# Altium PCB Sent Exp 9.PcbDoc
Units mm, origin at the board's own origin, x right, y up, seen from the top; angles counter-clockwise.
Board outline 152.4 x 136.53 mm, 2 copper layers (Top Layer, Bottom Layer); 86 components, 149 nets, 293 pads, 0 vias.
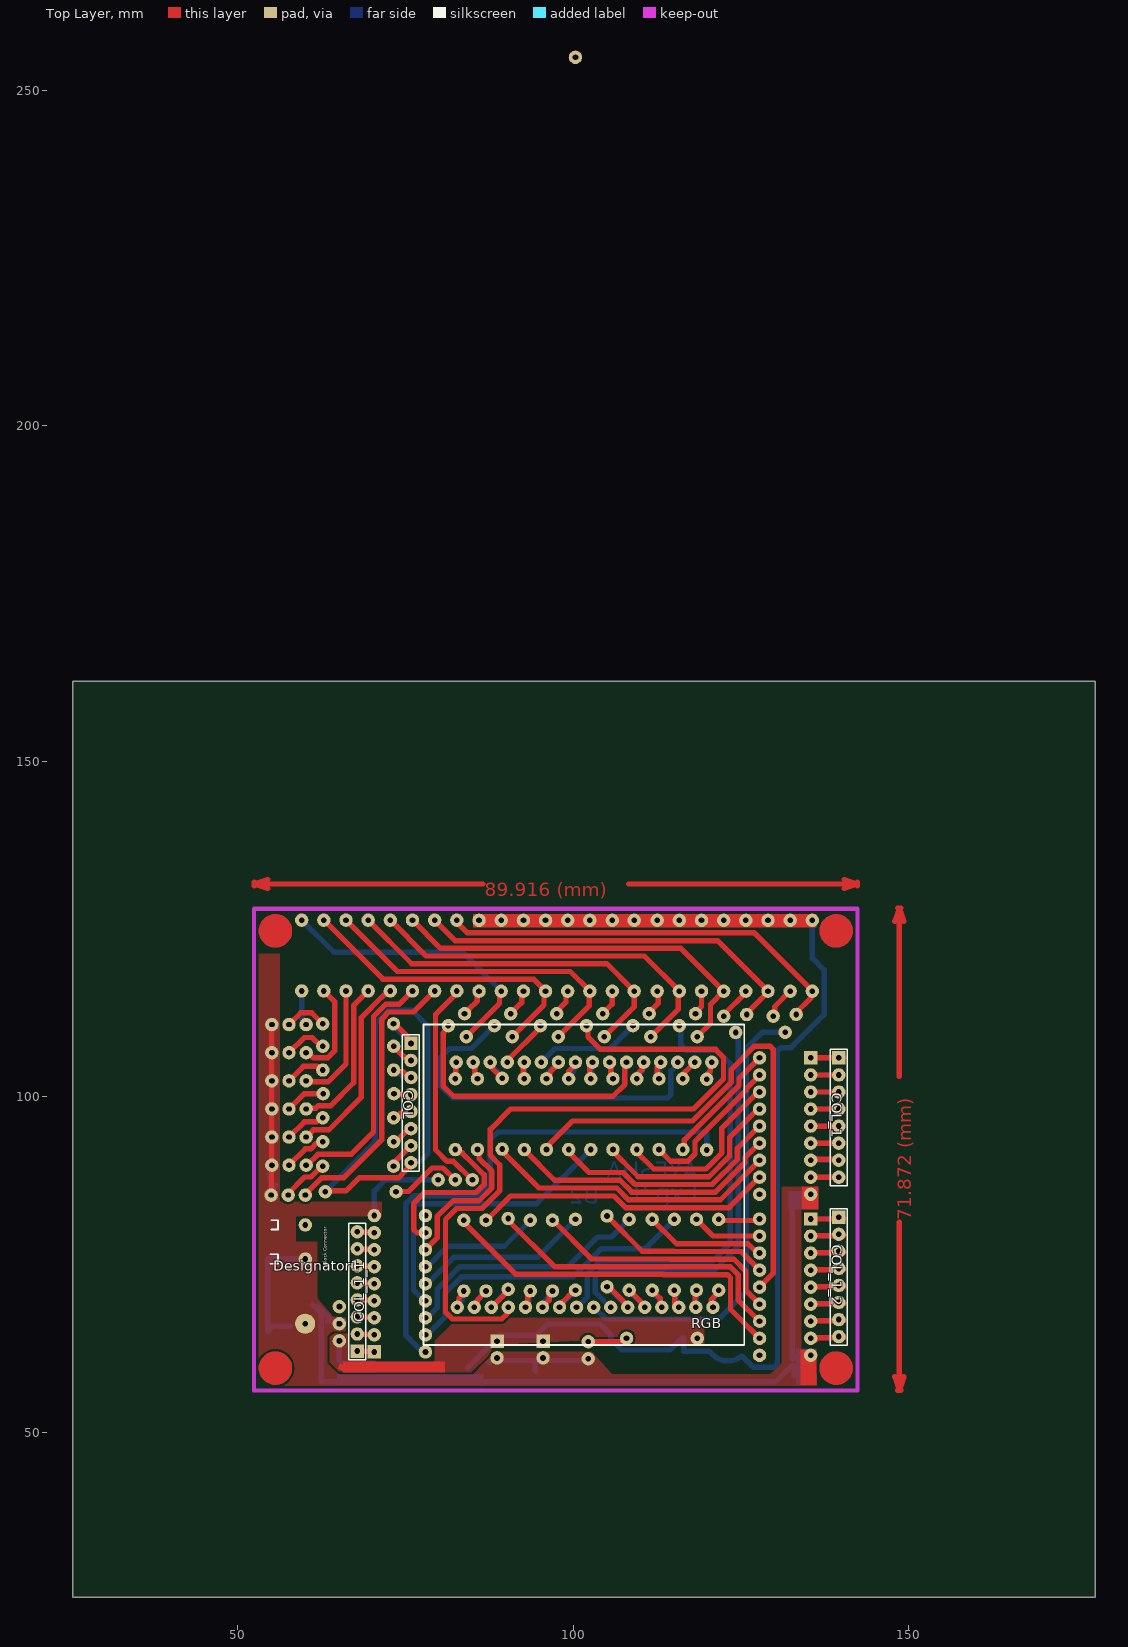
[diagram p0: Top Layer view]
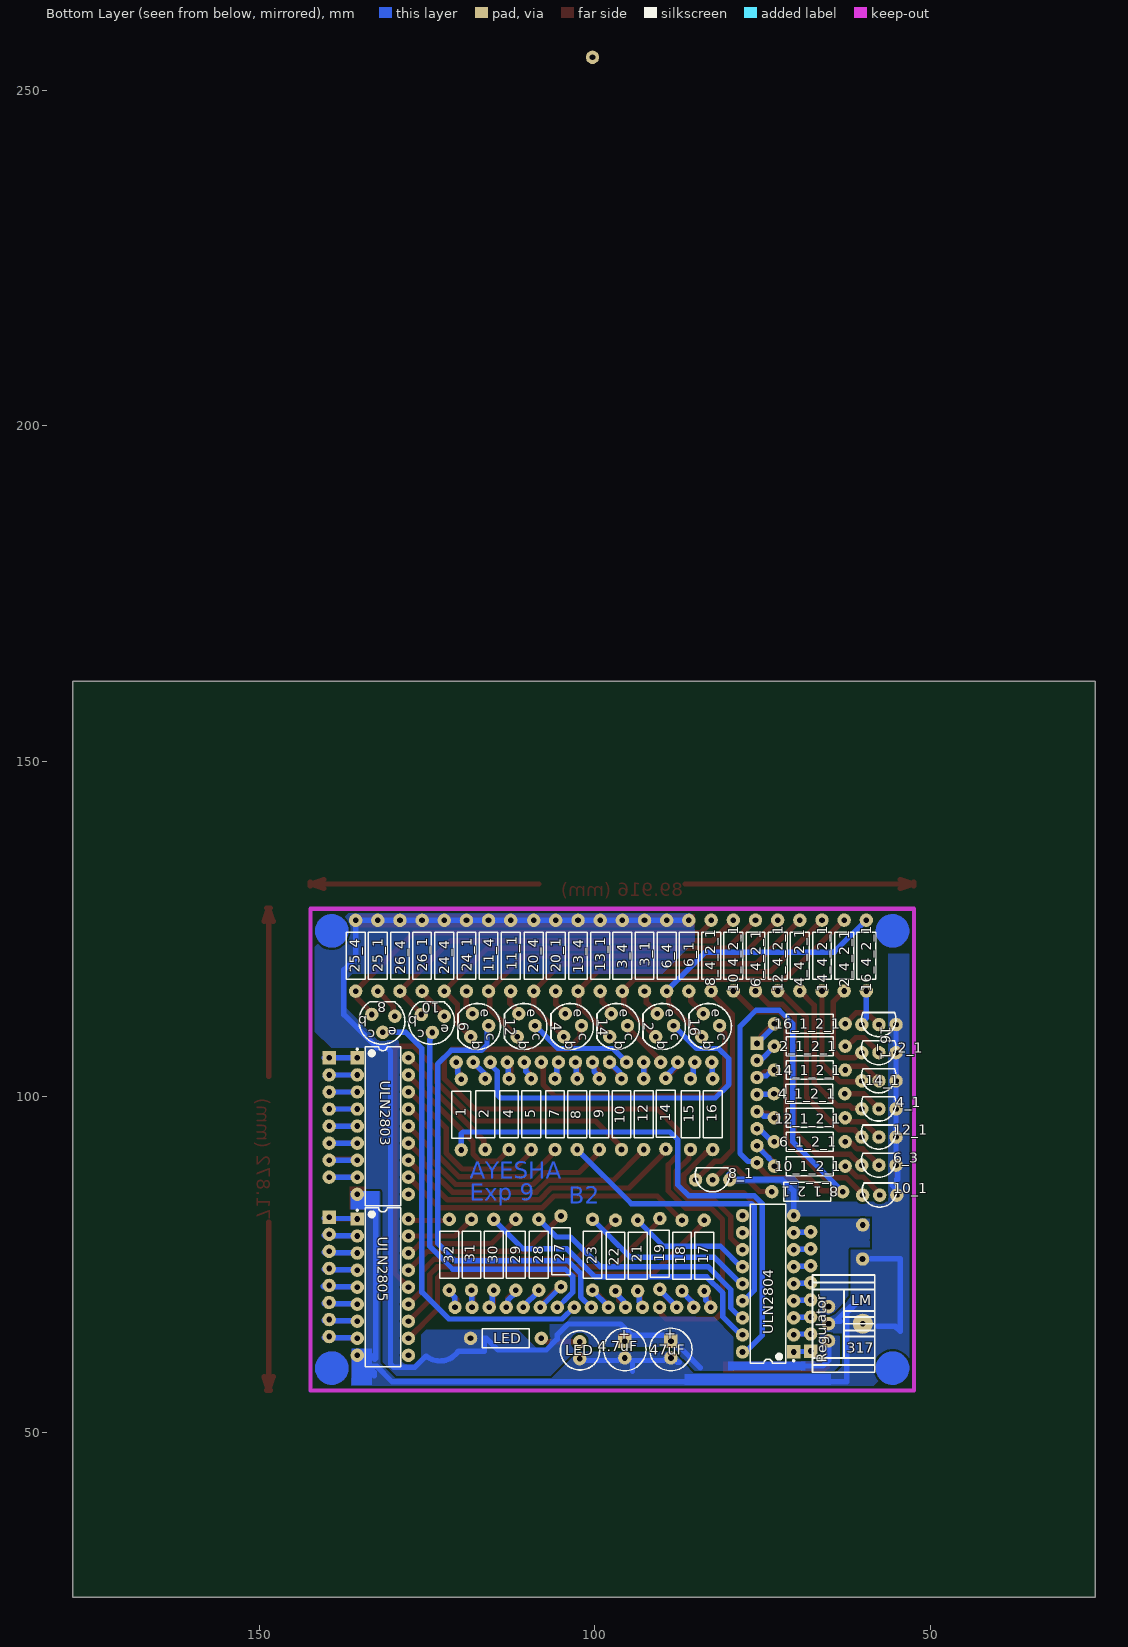
[diagram p1: Bottom Layer view, seen from below]

## Layer stack, top to bottom
Top Solder: solder mask 0.0102, Solder Resist, Dk 3.5
Top Layer: signal copper 0.0356
Dielectric 1: dielectric 0.32, FR-4, Dk 4.8
Bottom Layer: signal copper 0.0356
Bottom Solder: solder mask 0.0102, Solder Resist, Dk 3.5

## Board outline
25.4,25.4 177.8,25.4 177.8,161.925 25.4,161.925

## Design rules (kind name [scope] priority, off if disabled: settings)
Clearance [All] p1: gap=0.35 ignorepadtopadclearanceinfootprint=FALSE
PlaneClearance [All] p1: clearance=0.85
PolygonConnect [All] p1: connectstyle=Direct reliefconductorwidth=0.254 reliefentries=4 polygonreliefangle="90 Angle" airgapwidth=0.254
RoutingVias [All] p1: holewidth=0.711 width=1.27 viastyle="Through Hole" minholewidth=0.711 minwidth=1.27 maxholewidth=0.711 maxwidth=1.27
SolderMaskExpansion [All] p1: expansion=0.102 istentingtop=FALSE
Width [All] p1: maxlimit=0.8 minlimit=0.8 preferedwidth=0.8
29 further rules are at their usual default settings.

## Components (designator, comment, footprint, x,y, rotation, side; value= is the part's Value field where it differs from the comment)
1 "Comment" RES10.55-7X2.8#1 119.888,97.35 r270 bottom
2 "Comment" RES10.55-7X2.8#1 116.332,97.409 r270 bottom
2 "Comment" "TO-92 Packaging" 89.587,110.664 r0 bottom
2_1 "Comment" 2N3904 57.646,106.563 r0 bottom
2_1_2_1 "Comment" RES10.55-7X2.8#1 67.96,107.538 r180 bottom
2_4_2_1 "Comment" RES10.55-7X2.8#1 62.834,121.046 r90 bottom
3_1 "Comment" RES10.55-7X2.8#1 92.575,121.015 r90 bottom
3_4 "Comment" RES10.55-7X2.8#1 95.877,121.015 r90 bottom
4 "Comment" RES10.55-7X2.8#1 112.776,97.409 r270 bottom
4 "Comment" "TO-92 Packaging" 103.303,110.664 r0 bottom
4.7uF "Comment" CAPPR2.5-6.3x15 95.504,62.337 r270 bottom
4_1 "Comment" 2N3904 57.646,98.181 r0 bottom
4_1_2_1 "Comment" RES10.55-7X2.8#2 68.004,100.457 r180 bottom
4_4_2_1 "Comment" RES10.55-7X2.8#1 69.438,121.046 r90 bottom
5 "Comment" RES10.55-7X2.8#1 109.474,97.409 r270 bottom
6 "Comment" "TO-92 Packaging" 117.146,110.664 r0 bottom
6_1 "Comment" RES10.55-7X2.8#1 85.971,121.015 r90 bottom
6_1_2_1 "Comment" RES10.55-7X2.8#1 67.96,93.314 r180 bottom
6_3 "Comment" 2N3904 57.646,89.799 r0 bottom
6_4 "Comment" RES10.55-7X2.8#1 89.273,121.015 r90 bottom
6_4_2_1 "Comment" RES10.55-7X2.8#1 76.042,121.046 r90 bottom
7 "Comment" RES10.55-7X2.8#1 105.918,97.409 r270 bottom
8 "Comment" RES10.55-7X2.8#3 102.616,97.409 r270 bottom
8 "Comment" "TO-92 Packaging" 131.509,110.934 r90 bottom
8_1 "Comment" 2N3904 82.423,87.63 r0 bottom
8_1_2_1 "Comment" RES10.55-7X2.8#2 68.326,85.852 r0 bottom
8_4_2_1 "Comment" RES10.55-7X2.8#1 82.646,121.046 r90 bottom
9 "Comment" RES10.55-7X2.8#1 99.314,97.409 r270 bottom
10 "Comment" RES10.55-7X2.8#3 96.012,97.409 r270 bottom
10 "Comment" "TO-92 Packaging" 124.131,110.918 r90 bottom
10_1 "Comment" 2N3904 57.531,85.344 r0 bottom
10_1_2_1 "Comment" RES10.55-7X2.8#1 67.945,89.662 r180 bottom
10_4_2_1 "Comment" RES10.55-7X2.8#1 79.344,121.046 r90 bottom
11_1 "Comment" RES10.55-7X2.8#1 112.514,121.015 r90 bottom
11_4 "Comment" RES10.55-7X2.8#1 115.816,121.015 r90 bottom
12 "Comment" RES10.55-7X2.8#1 92.71,97.409 r270 bottom
12 "Comment" "TO-92 Packaging" 110.224,110.664 r0 bottom
12_1 "Comment" 2N3904 57.646,93.99 r0 bottom
12_1_2_1 "Comment" RES10.55-7X2.8#1 67.96,96.87 r180 bottom
12_4_2_1 "Comment" RES10.55-7X2.8#1 72.74,121.046 r90 bottom
13_1 "Comment" RES10.55-7X2.8#1 99.179,121.015 r90 bottom
13_4 "Comment" RES10.55-7X2.8#1 102.481,121.015 r90 bottom
14 "Comment" RES10.55-7X2.8#1 89.408,97.477 r270 bottom
14 "Comment" "TO-92 Packaging" 96.445,110.664 r0 bottom
14_1 "Comment" 2N3904 57.646,102.372 r0 bottom
14_1_2_1 "Comment" RES10.55-7X2.8#1 67.96,103.982 r180 bottom
14_4_2_1 "Comment" RES10.55-7X2.8#1 66.136,121.046 r90 bottom
15 "Comment" RES10.55-7X2.8#1 85.725,97.409 r270 bottom
16 "Comment" RES10.55-7X2.8#1 82.423,97.409 r270 bottom
16 "Comment" "TO-92 Packaging" 82.729,110.664 r0 bottom
16_1 "Comment" 2N3904 57.646,110.754 r0 bottom
16_1_2_1 "Comment" RES10.55-7X2.8#1 67.945,110.871 r180 bottom
16_4_2_1 "Comment" RES10.55-7X2.8#1 59.532,121.046 r90 bottom
17 "Comment" RES10.55-7X2.8#1 83.693,76.327 r270 bottom
18 "Comment" RES10.55-7X2.8#1 86.995,76.327 r270 bottom
19 "Comment" RES10.55-7X2.8#1 90.297,76.581 r270 bottom
20_1 "Comment" RES10.55-7X2.8#2 105.815,121.015 r90 bottom
20_4 "Comment" RES10.55-7X2.8#1 109.085,121.015 r90 bottom
21 "Comment" RES10.55-7X2.8#1 93.599,76.327 r270 bottom
22 "Comment" RES10.55-7X2.8#3 96.901,76.327 r270 bottom
23 "Comment" RES10.55-7X2.8#1 100.33,76.454 r270 bottom
24_1 "Comment" RES10.55-7X2.8#1 119.118,121.015 r90 bottom
24_4 "Comment" RES10.55-7X2.8#1 122.42,121.015 r90 bottom
25_1 "Comment" RES10.55-7X2.8#2 132.326,121.015 r90 bottom
25_4 "Comment" RES10.55-7X2.8#1 135.628,121.015 r90 bottom
26_1 "Comment" RES10.55-7X2.8#1 125.722,121.015 r90 bottom
26_4 "Comment" RES10.55-7X2.8#1 129.024,121.015 r90 bottom
27 "Comment" RES10.55-7X2.8#3 105.029,76.962 r270 bottom
28 "Comment" RES10.55-7X2.8#1 108.331,76.454 r270 bottom
29 "Comment" RES10.55-7X2.8#1 111.76,76.454 r270 bottom
30 "Comment" RES10.55-7X2.8#1 115.062,76.454 r270 bottom
31 "Comment" RES10.55-7X2.8#1 118.364,76.454 r270 bottom
32 "Comment" RES10.55-7X2.8#1 121.666,76.454 r270 bottom
47uF "Comment" CAPPR2.5-6.3x15 88.646,62.337 r270 bottom
COL "Comment" HDR1X8 75.819,107.95 r270 top
COL_1 "Comment" HDR1X8 139.573,105.791 r270 top
COL_1_1 "Comment" HDR1X8 67.818,62.103 r90 top
COL_1_2 "Comment" HDR1X8 139.573,82.042 r270 top
Designator1 "Comment" "PCB Block Connector" 59.831,78.359 r90 top
LED "Comment" RES10.55-7X2.8#1 113.225,64.008 r180 bottom
LED "Comment" LED 102.235,62.23 r180 bottom
Regulator "Comment" "LM317 with Heat Sink" 65.151,66.177 r270 bottom
RGB "Comment" "RGB 4.7X4.7" 101.684,86.894 r180 top
ULN2803 "Comment" DIP-18 131.572,95.631 r180 bottom
ULN2804 "Comment" DIP-18 74.168,72.136 r0 bottom
ULN2805 "Comment" DIP-18 131.572,71.628 r180 bottom

## Footprints (in the part's own frame and the unit in brackets; to place one, negate y for a bottom-side part, rotate by r counter-clockwise, add the part's x,y. Pads: shape width x height; smd on the part's side, far side on the other; paste and mask are expansions set on the pad)
2N3904 [mm]
  round 2 hole 0.7 slot 0.8 at 0 deg: b(0,0) c(2.55,0) e(-2.55,0)
  silkscreen extent -2.53,-1.8 2.59,1.8
CAPPR2.5-6.3x15 [mm] "Capacitor, Electrolytic, Radial; Body 6.3 x 15 mm (Dia.xH typ); Pin Spacing 2.5 mm (typ)"
  rect 2x2 hole 0.85: 1(-1.25,0)
  round 2 hole 0.85: 2(1.25,0)
  silkscreen extent -3.15,-3.15 3.15,3.15
DIP-18 [mm] "DIP; 18 Leads; Row Spacing 7.62 mm; Pitch 2.54 mm"
  rect 2x2 hole 0.85: 1(-3.81,10.16)
  round 2 hole 0.85: 2(-3.81,7.62) 3(-3.81,5.08) 4(-3.81,2.54) 5(-3.81,0) 6(-3.81,-2.54) 7(-3.81,-5.08) 8(-3.81,-7.62) 9(-3.81,-10.16) 10(3.81,-10.16) 11(3.81,-7.62) 12(3.81,-5.08) 13(3.81,-2.54) 14(3.81,0) 15(3.81,2.54) 16(3.81,5.08) 17(3.81,7.62) 18(3.81,10.16)
  silkscreen extent -3.94,-11.85 2.65,11.85, body extent -3.6,-11.8 3.6,11.8, height 5.08
HDR1X8 [mm] "Connector; Header; 8 Position"
  rect 2x2 hole 0.85: 1(0,0)
  round 2 hole 0.85: 2(2.54,0) 3(5.08,0) 4(7.62,0) 5(10.16,0) 6(12.7,0) 7(15.24,0) 8(17.78,0)
  silkscreen extent -1.27,-1.27 19.05,1.27
LED [mm]
  round 2 hole 0.85: 1(0,1.27) 2(0,-1.27)
  silkscreen extent -2.87,-2.95 2.98,2.89
"LM317 with Heat Sink" [mm]
  round 2 hole 0.85 slot 0.8 at 0 deg: adj(-2.55,0) in(2.55,0) out(0,0)
  round 3 hole 0.85: out(0,5.1)
  silkscreen extent -7.25,-2.4 7.25,6.9
"PCB Block Connector" [mm]
  round 2 hole 0.85: 1(-2.54,-0.254) 2(2.54,-0.24)
  silkscreen extent -3.22,3.82 3.26,4.96, body extent -5,-5.45 5.03,4.96, height 5.08
RES10.55-7X2.8#1 [mm] "Resistor, Axial; Body 7 x 2.8 mm (LxDia. max), Lead Dia. 0.65 mm (max)"
  round 2 hole 0.85: 1(-5.275,0) 2(5.275,0)
  silkscreen extent -3.5,-1.4 3.5,1.4
RES10.55-7X2.8#2 [mm] "Resistor, Axial; Body 7 x 2.8 mm (LxDia. max), Lead Dia. 0.65 mm (max)"
  round 2 hole 0.85: ""(-5.275,0) ""(5.275,0)
  silkscreen extent -3.5,-1.4 3.5,1.4
RES10.55-7X2.8#3 [mm] "Resistor, Axial; Body 7 x 2.8 mm (LxDia. max), Lead Dia. 0.65 mm (max)"
  round 2 hole 0.85: 1(-5.275,0) ""(5.275,0)
  silkscreen extent -3.5,-1.4 3.5,1.4
"RGB 4.7X4.7" [mm]
  round 2 hole 0.85: 1(-18.966,-18.262) 2(-16.426,-18.262) 3(-13.886,-18.262) 4(-11.346,-18.262) 5(-8.806,-18.262) 6(-6.266,-18.262) 7(-3.726,-18.262) 8(-1.186,-18.262) 9(1.354,-18.262) 10(3.894,-18.262) 11(6.434,-18.262) 12(8.974,-18.262) 13(11.514,-18.262) 14(14.054,-18.262) 15(16.594,-18.262) 16(19.134,-18.262) 17(18.966,18.262) 18(16.426,18.262) 19(13.886,18.262) 20(11.346,18.262) 21(8.806,18.262) 22(6.266,18.262) 23(3.726,18.262) 24(1.186,18.262) 25(-1.354,18.262) 26(-3.894,18.262) 27(-6.434,18.262) 28(-8.974,18.262) 29(-11.514,18.262) 30(-14.054,18.262) 31(-16.594,18.262) 32(-19.134,18.262)
  silkscreen extent -23.78,-23.9 23.99,23.89
"TO-92 Packaging" [mm] "for 2N3904"
  round 2 hole 0.85: P_b(1.334,1.714) P_c(-1.333,0.063) P_e(1.08,-1.715)
  silkscreen extent -3.1,-3.23 3.22,3.61

## Free pads (board coordinates)
  round 2 hole 0.85: 2(100.33,254.889)

## Nets (pads, with @x,y where several pads share a name; then routed paths per layer and width w, separated by ;. In a path a pad name is that pad's centre, name@x,y a point inside that pad or via, vN(x,y) a via of type N, cw(c..) or ccw(c..) an arc to the next point about the centre after c; other vN are vias at no path point)
1: 1.1 RGB.1 | length 6.1
  Top Layer w0.8: 1.1@119.253,102.625 119.483,102.855 119.793,102.855 120.118,103.179 120.118,103.49 120.461,103.833 120.461,104.967 RGB.1
  Bottom Layer w0.8: 1.1 119.888,102.95 120.42,103.482 120.42,104.926 RGB.1
2: 2.1 RGB.2 | length 6.7
  Top Layer w0.8: 2.1@115.697,102.684 115.697,102.714 118.11,105.127 RGB.2
  Bottom Layer w0.8: 2.1 116.562,102.914 116.562,103.593 118.11,105.142 RGB.2
3: 2.P_c RGB.3 | length 54.9
  Bottom Layer w0.8: 2.P_c 84.84,107.188 81.534,107.188 80.01,105.664 80.01,101.854 82.042,99.822 114.057,99.822 114.526,100.291 114.526,103.787 115.57,104.831 RGB.3
4: 4.1 RGB.4 | length 5.3
  Top Layer w0.8: 4.1@112.395,102.684 112.503,102.792 112.503,104.304 113.03,104.831 RGB.4
  Bottom Layer w0.8: 4.1 112.903,102.811 112.903,105.029 RGB.4
5: 5.1 RGB.5 | length 5.6
  Top Layer w0.8: 5.1@109.093,102.684 109.093,102.871 110.26,104.038 RGB.5@110.26,104.878
  Bottom Layer w0.8: 5.1 109.474,103.009 110.26,103.795 110.26,104.926 RGB.5
6: 16.P_c RGB.6 | length 41.2
  Top Layer w0.8: 16.P_c 81.395,110.276 80.624,109.505 80.624,101.621 82.169,100.076 105.918,100.076 107.696,101.854 107.696,104.087 107.72,104.112 107.72,104.926 RGB.6
7: 7.1 RGB.7 | length 5.1
  Top Layer w0.8: RGB.7 105.593,104.973 105.593,102.881 7.1@105.664,102.81
  Bottom Layer w0.8: RGB.7 105.64,104.926 105.64,103.287 105.918,103.009 7.1
8: 8.1 RGB.8 | length 4.5
  Top Layer w0.8: 8.1@102.297,103.065 102.47,103.238 102.47,104.431 102.64,104.602 RGB.8@102.64,104.878
  Bottom Layer w0.8: 8.1 102.743,102.811 102.743,105.029 RGB.8
9: 9.1 RGB.9 | length 5.5
  Top Layer w0.8: 9.1@99.06,102.684 99.29,102.914 99.29,103.791 100.1,104.602 RGB.9@100.1,104.878
  Bottom Layer w0.8: 9.1 99.314,103.009 100.1,103.795 100.1,104.926 RGB.9
10: 10.1 RGB.10 | length 6.4
  Top Layer w0.8: 10.1 96.012,103.009 96.548,103.544 96.548,103.66 97.79,104.902 RGB.10
  Bottom Layer w0.8: 10.1 96.242,102.914 96.242,103.593 97.79,105.142 RGB.10
11: 12.P_c RGB.11 | length 15.9
  Bottom Layer w0.8: RGB.11 97.294,107.2 105.49,107.2 12.P_c
12: 12.1 RGB.12 | length 4.6
  Top Layer w0.8: 12.1@92.202,103.081 92.369,103.081 92.527,103.238 92.527,104.831 RGB.12@92.425,104.933
  Bottom Layer w0.8: 12.1 RGB.12
13: 14.P_c RGB.13 | length 7.5
  Top Layer w0.8: RGB.13 90.17,105.408 95.111,110.349 14.P_c
14: 14.1 RGB.14 | length 6.7
  Top Layer w0.8: RGB.14@87.122,105.156 87.305,105.156 RGB.14@87.468,104.994 ; RGB.14 87.86,104.926 87.86,104.303 89.154,103.009 14.1@89.154,102.684
  Bottom Layer w0.8: RGB.14 87.63,104.843 89.408,103.065 14.1
15: 15.1 RGB.15 | length 5.6
  Top Layer w0.8: RGB.15@84.812,104.602 RGB.15@84.812,104.672 ; RGB.15 85.32,104.926 85.32,103.541 85.852,103.009 15.1@85.852,102.684
  Bottom Layer w0.8: RGB.15 85.32,104.926 85.32,103.414 85.725,103.009 15.1
16: 16.1 RGB.16 | length 5
  Top Layer w0.8: 16.1@82.55,102.684 82.494,102.74 82.494,105.1 RGB.16
  Bottom Layer w0.8: 16.1 82.486,102.748 82.486,105.093 RGB.16
17: 17.2 RGB.17 | length 5.5
  Top Layer w0.8: RGB.17@82.971,68.632 82.947,68.656 82.947,69.676 82.971,69.701 82.971,70.005 83.463,70.498 83.463,71.028 17.2@83.439,71.052
  Bottom Layer w0.8: RGB.17 82.717,68.957 83.463,69.703 83.463,70.822 17.2
18: 18.2 RGB.18 | length 6.1
  Top Layer w0.8: RGB.18@85.511,68.632 85.741,68.862 85.741,69.727 86.741,70.727 18.2@86.741,71.052
  Bottom Layer w0.8: RGB.18 85.487,68.862 85.487,69.449 86.995,70.957 18.2
19: 19.2 RGB.19 | length 7
  Top Layer w0.8: RGB.19@88.051,68.632 88.051,68.846 90.043,70.838 19.2@90.043,71.052
  Bottom Layer w0.8: RGB.19 87.797,68.719 90.297,71.219 19.2
20: 4.P_c RGB.20 | length 108.3
  Top Layer w0.8: RGB.20@90.281,68.251 90.107,68.078 90.107,67.64 89.349,66.882 81.992,66.882 80.967,67.907 80.967,81.7 82.619,83.352 86.423,83.352 89.027,85.956 89.027,89.869 87.658,91.238 87.658,95.151 90.678,98.171 117.909,98.171 122.4,102.662 122.4,105.881 121.22,107.061 104.05,107.061 102.199,108.912 102.199,110.371 4.P_c
21: 21.2 RGB.21 | length 5.2
  Top Layer w0.8: RGB.21@93.131,68.632 93.238,68.739 93.238,70.945 21.2@93.345,71.052
  Bottom Layer w0.8: RGB.21 92.877,68.957 93.369,69.449 93.369,70.822 21.2
22: 22. RGB.22 | length 5.9
  Top Layer w0.8: RGB.22@95.671,68.632 95.671,68.957 96.417,69.703 96.417,70.822 22.@96.647,71.052
  Bottom Layer w0.8: RGB.22 95.647,68.862 95.647,69.473 96.901,70.727 22.
23: 23.2 RGB.23 | length 6.7
  Top Layer w0.8: RGB.23@98.211,68.632 98.441,68.862 98.441,69.449 99.949,70.957 23.2@99.949,71.052
  Bottom Layer w0.8: RGB.23 97.957,68.719 100.33,71.092 23.2
24: 6.P_c RGB.24 | length 67.1
  Bottom Layer w0.8: RGB.24 100.562,68.632 102.108,70.178 102.108,73.685 103.988,75.565 120.802,75.565 123.416,78.179 123.416,104.865 121.375,106.906 116.868,106.906 116.042,107.732 116.042,110.371 6.P_c
25: 8.P_c RGB.25 | length 68.2
  Bottom Layer w0.8: RGB.25 103.102,68.632 104.852,66.882 121.746,66.882 125.758,70.894 125.758,107.216 128.143,109.601 8.P_c
26: 10.P_c RGB.26 | length 60.8
  Bottom Layer w0.8: RGB.26 105.512,68.632 103.762,70.382 103.748,70.382 103.279,70.851 103.279,73.229 104.345,74.295 121.158,74.295 124.608,77.745 124.608,108.516 124.424,108.701 124.424,109.355 10.P_c
27: 27. RGB.27 | length 8.8
  Top Layer w0.8: 27.@105.029,71.179 105.305,71.455 105.581,71.455 108.117,68.918 RGB.27@108.117,68.759
  Bottom Layer w0.8: 27. 105.046,71.687 108.1,68.632 RGB.27
28: 28.2 RGB.28 | length 6.8
  Top Layer w0.8: 28.2 110.312,69.198 110.312,68.922 RGB.28@110.149,68.759
  Bottom Layer w0.8: 28.2 108.331,71.069 110.657,68.742 RGB.28
29: 29.2 RGB.29 | length 5.8
  Top Layer w0.8: 29.2 111.76,71.164 112.967,69.957 RGB.29@112.967,69.037
  Bottom Layer w0.8: 29.2 111.76,70.854 112.967,69.647 112.967,68.862 RGB.29
30: 30.2 RGB.30 | length 5.3
  Top Layer w0.8: 30.2 115.146,71.095 115.146,68.843 RGB.30@115.229,68.759
  Bottom Layer w0.8: 30.2 115.292,70.949 115.292,69.402 115.737,68.957 RGB.30
31: 31.2 RGB.31 | length 5.2
  Top Layer w0.8: RGB.31@117.769,68.759 117.769,69.084 118.134,69.449 118.134,70.949 31.2
  Bottom Layer w0.8: RGB.31 118.321,68.676 118.321,71.135 31.2
32: 32.2 RGB.32 | length 5.9
  Top Layer w0.8: RGB.32@120.309,68.759 120.539,68.989 120.539,69.727 121.666,70.854 32.2
  Bottom Layer w0.8: RGB.32 120.85,68.665 120.85,70.11 121.666,70.926 32.2
130: 
D1: COL_1_1.1 ULN2804.1 | length 5.2
  Top Layer w0.8: COL_1_1.1 67.882,62.039 70.294,62.039 ULN2804.1
  Bottom Layer w0.8: COL_1_1.1 67.882,62.039 70.294,62.039 ULN2804.1
D2: COL_1.1 ULN2803.1 | length 9.9
  Top Layer w0.8: ULN2803.1 COL_1.1@140.335,105.791
  Bottom Layer w0.8: ULN2803.1 COL_1.1@140.335,105.791
D3: 2_1_2_1.1 COL.2 | length 7.3
  Top Layer w0.8: 2_1_2_1.1 73.235,107.473 74.508,106.2 74.803,105.905 74.999,105.905 75.494,105.41 COL.2
  Bottom Layer w0.8: 2_1_2_1.1 73.248,107.538 73.406,107.696 73.406,107.302 75.069,105.64 75.589,105.64 COL.2
D4: COL_1.2 ULN2803.2 | length 9.1
  Top Layer w0.8: ULN2803.2 COL_1.2
  Bottom Layer w0.8: ULN2803.2 COL_1.2 139.803,103.021 COL_1.2@140.184,103.021
D5: COL_1.3 ULN2803.3 | length 8.4
  Top Layer w0.8: ULN2803.3 COL_1.3
  Bottom Layer w0.8: ULN2803.3 COL_1.3
D6: 16_1_2_1.1 COL.1 | length 8.4
  Top Layer w0.8: 16_1_2_1.1@73.235,110.915 16_1_2_1.1@73.235,111.042 ; 16_1_2_1.1@73.235,111.125 16_1_2_1.1@73.235,111.042 ; COL.1 75.219,108.55 75.219,109.058 16_1_2_1.1@73.235,111.042
  Bottom Layer w0.8: 16_1_2_1.1 73.22,110.549 COL.1
D7: COL_1.4 ULN2803.4 | length 8.4
  Top Layer w0.8: ULN2803.4 COL_1.4
  Bottom Layer w0.8: ULN2803.4 COL_1.4
D8: COL_1_1.4 ULN2804.4 | length 5.4
  Top Layer w0.8: COL_1_1.4@68.072,69.723 COL_1_1.4 67.882,69.659 70.294,69.659 ULN2804.4
  Bottom Layer w0.8: COL_1_1.4 67.882,69.659 70.294,69.659 ULN2804.4
D9: COL_1.5 ULN2803.5 | length 8.4
  Top Layer w0.8: ULN2803.5 COL_1.5
  Bottom Layer w0.8: ULN2803.5 COL_1.5
D10: COL_1_2.5 ULN2805.5 | length 10.3
  Top Layer w0.8: ULN2805.5 135.445,71.691 140.272,71.691 COL_1_2.5@140.335,71.755
  Bottom Layer w0.8: ULN2805.5 135.445,71.691 140.398,71.691 140.462,71.755 COL_1_2.5@140.335,71.755
D11: 12_1_2_1.1 COL.5 | length 5.9
  Top Layer w0.8: 12_1_2_1.1 73.56,96.87 74.25,97.56 75.589,97.56 COL.5
  Bottom Layer w0.8: 12_1_2_1.1 73.465,97.1 74.804,97.1 75.494,97.79 COL.5
D12: COL_1.6 ULN2803.6 | length 8.4
  Top Layer w0.8: ULN2803.6 COL_1.6
  Bottom Layer w0.8: ULN2803.6 COL_1.6
D13: 14_1_2_1.1 COL.3 | length 6.1
  Top Layer w0.8: 14_1_2_1.1 73.458,103.759 74.605,103.759 75.494,102.87 COL.3
  Bottom Layer w0.8: 14_1_2_1.1 73.56,103.982 74.442,103.1 75.589,103.1 COL.3
D14: COL_1.7 ULN2803.7 | length 8.5
  Top Layer w0.8: ULN2803.7 135.509,90.678 139.446,90.678 COL_1.7
  Bottom Layer w0.8: ULN2803.7 COL_1.7
D15: COL_1_1.7 ULN2804.7 | length 6.2
  Top Layer w0.8: COL_1_1.7@68.072,77.343 COL_1_1.7 67.882,77.279 70.294,77.279 ULN2804.7
  Bottom Layer w0.8: COL_1_1.7 COL_1_1.7@67.818,77.834 ; COL_1_1.7@67.818,77.851 COL_1_1.7@67.818,77.834 ; ULN2804.7 70.294,77.279 68.372,77.279 COL_1_1.7@67.818,77.834
D16: COL_1_1.8 ULN2804.8 | length 5.4
  Top Layer w0.8: COL_1_1.8@68.072,79.883 COL_1_1.8 67.882,79.819 70.294,79.819 ULN2804.8
  Bottom Layer w0.8: COL_1_1.8 67.882,79.819 70.294,79.819 ULN2804.8
D17: COL_1_2.8 ULN2805.8 | length 11.4
  Top Layer w0.8: ULN2805.8@136.144,63.754 136.12,63.778 135.612,63.778 ULN2805.8 135.445,64.072 136.12,64.072 140.272,64.072 COL_1_2.8@140.335,64.135
  Bottom Layer w0.8: ULN2805.8@135.128,64.389 ULN2805.8@135.382,64.135 ; ULN2805.8 ULN2805.8@135.382,64.135 ; COL_1_2.8@140.335,64.135 140.272,64.072 135.445,64.072 ULN2805.8@135.382,64.135
D18: COL_1.8 ULN2803.8 | length 8.4
  Top Layer w0.8: ULN2803.8 COL_1.8
  Bottom Layer w0.8: ULN2803.8 COL_1.8
D19: COL_1_2.7 ULN2805.7 | length 10
  Top Layer w0.8: ULN2805.7 135.445,66.611 140.272,66.611 COL_1_2.7@140.335,66.675
  Bottom Layer w0.8: ULN2805.7 135.445,66.611 140.272,66.611 COL_1_2.7@140.335,66.675
D20: 4_1_2_1.@73.279,100.457 COL.4 | length 5.2
  Top Layer w0.8: 4_1_2_1.@73.279,100.457 73.343,100.394 75.755,100.394 COL.4
  Bottom Layer w0.8: 4_1_2_1.@73.279,100.457 73.343,100.394 75.755,100.394 COL.4
D21: COL_1_1.6 ULN2804.6 | length 5.4
  Top Layer w0.8: COL_1_1.6@68.072,74.803 COL_1_1.6 67.882,74.739 70.294,74.739 ULN2804.6
  Bottom Layer w0.8: COL_1_1.6 67.882,74.739 70.294,74.739 ULN2804.6
D22: COL_1_2.6 ULN2805.6 | length 10
  Top Layer w0.8: ULN2805.6 135.445,69.151 140.272,69.151 COL_1_2.6@140.335,69.215
  Bottom Layer w0.8: ULN2805.6 135.445,69.151 140.272,69.151 COL_1_2.6@140.335,69.215
D23: COL_1_1.5 ULN2804.5 | length 5.4
  Top Layer w0.8: COL_1_1.5@68.072,72.263 COL_1_1.5 67.882,72.2 70.294,72.2 ULN2804.5
  Bottom Layer w0.8: COL_1_1.5 67.882,72.2 70.294,72.2 ULN2804.5
D24: 6_1_2_1.1 COL.6 | length 7
  Top Layer w0.8: 6_1_2_1.1 73.559,93.314 75.495,95.25 COL.6
  Bottom Layer w0.8: 6_1_2_1.1 73.235,93.555 73.279,93.599 73.334,93.544 73.789,93.544 75.495,95.25 COL.6
D25: 8_1_2_1.@63.051,85.852 COL.8 | length 74.6
  Top Layer w0.8: 8_1_2_1.@63.051,85.979 66.139,85.979 68.072,87.912 73.945,87.912 74.97,88.937 74.97,88.996 75.819,89.845 COL.8
  Bottom Layer w0.8: 8_1_2_1.@63.051,85.852 70.485,93.286 70.485,110.871 72.503,112.889 75.96,112.889 77.851,110.998 78.359,110.49 78.359,91.567 77.146,90.354 76.003,90.354 COL.8
D26: 10_1_2_1.1 COL.7 | length 8.2
  Top Layer w0.8: 10_1_2_1.1 73.45,89.892 73.45,90.341 COL.7
  Bottom Layer w0.8: 10_1_2_1.1 73.22,89.987 74.069,90.836 74.069,90.895 75.819,92.645 COL.7
D27: COL_1_2.4 ULN2805.4 | length 10.2
  Top Layer w0.8: ULN2805.4@135.255,74.041 ULN2805.4 135.445,74.231 140.272,74.231 COL_1_2.4@140.335,74.295
  Bottom Layer w0.8: ULN2805.4 135.445,74.231 140.272,74.231 COL_1_2.4@140.335,74.295
D28: COL_1_1.3 ULN2804.3 | length 5.5
  Top Layer w0.8: COL_1_1.3@68.072,67.183 68.072,67.248 68.007,67.183 COL_1_1.3 67.882,67.12 70.294,67.12 ULN2804.3
  Bottom Layer w0.8: COL_1_1.3 67.882,67.12 70.294,67.12 ULN2804.3
D29: COL_1_2.3 ULN2805.3 | length 10.6
  Top Layer w0.8: ULN2805.3 135.382,76.327 135.826,76.772 140.272,76.772 COL_1_2.3@140.335,76.835
  Bottom Layer w0.8: ULN2805.3 135.445,76.772 140.272,76.772 COL_1_2.3@140.335,76.835
D30: COL_1_1.2 ULN2804.2 | length 5.2
  Top Layer w0.8: COL_1_1.2 67.882,64.579 70.294,64.579 ULN2804.2
  Bottom Layer w0.8: COL_1_1.2 70.231,64.643 ULN2804.2
D31: COL_1_2.2 ULN2805.2 | length 10
  Top Layer w0.8: ULN2805.2 135.445,79.311 140.272,79.311 COL_1_2.2@140.335,79.375
  Bottom Layer w0.8: ULN2805.2 135.445,79.311 140.272,79.311 COL_1_2.2@140.335,79.375
D32: COL_1_2.1 ULN2805.1 | length 10.1
  Top Layer w0.8: ULN2805.1 139.735,81.788 139.827,81.696 139.827,81.661 140.081,81.915 COL_1_2.1@140.335,81.915
  Bottom Layer w0.8: ULN2805.1 135.445,81.852 140.272,81.852 COL_1_2.1@140.335,81.915
GND: 2_1.e 4.7uF.2 4_1.e 6_3.e 8_1.e 10_1.e 12_1.e 14_1.e 16_1.e 47uF.2 Designator1.1 LED.2@102.235,60.96 Regulator.out ULN2803.9 ULN2804.9 ULN2805.9 | length 226.5
  Top Layer w0.8: 10_1.e 55.039,85.401 55.039,110.697 16_1.e
  Bottom Layer w0.8: 10_1.e@54.864,85.979 55.698,86.813 ; 54.864,87.729 54.864,89.242 55.096,89.474 6_3.e 14_1.e 2_1.e 16_1.e ; 10_1.e 54.981,87.729 ; 57.813,65.796 55.225,65.796 54.473,65.044 54.473,75.839 58.801,75.839 ; 61.175,69.033 61.681,68.527 ; 61.898,68.743 64.083,66.558 ; 61.976,68.232 62.445,67.763 62.445,57.531 130.175,57.531 132.492,59.848 133.623,59.848 ; 63.401,66.558 64.083,66.558 ; Regulator.out@65.913,66.558 64.083,66.558 ; ULN2804.9 70.358,85.979 72.009,87.63 8_1.e@80.508,87.63 ; 8_1.e 80,87.757 8_1.e@80,88.392 ; 87.418,60.452 87.686,60.452 88.092,60.857 89.563,60.857 89.715,60.706 94.361,60.706 ; 94.361,59.055 94.361,60.706 ; LED.2@101.379,60.706 96.573,60.706 96.421,60.857 95.655,60.857 95.504,60.706 94.361,60.706 ; 132.653,61.025 132.653,85.002 133.122,85.471 ULN2803.9 ; 132.773,60.905 133.337,61.468 134.112,61.468 ; 132.842,58.42 132.842,58.928 ULN2805.9 134.112,61.468 ; 134.112,60.337 134.112,61.468
i1: 1.2 ULN2804.18 | length 79.5
  Bottom Layer w0.8: ULN2804.18@78.105,61.722 77.78,61.722 75.05,64.452 75.05,84.082 76.192,85.224 85.979,85.224 87.63,86.875 87.63,93.599 88.773,94.742 119.634,94.742 119.888,94.488 1.2
i2: 2.2 ULN2803.18 | length 18.3
  Top Layer w0.8: 2.2@116.159,92.286 116.562,92.688 116.562,93.571 124.7,101.709 124.7,102.729 ULN2803.18
i3: 
i4: 4.2 ULN2803.17 | length 22.3
  Top Layer w0.8: 4.2 114.526,90.384 117.057,90.384 118.138,91.465 118.138,93.349 124.599,99.81 125.758,100.969 125.758,101.182 127.762,103.186 ULN2803.17
i5: 5.2 ULN2803.16 | length 27.1
  Top Layer w0.8: 5.2@109.155,92.072 111.993,89.234 119.751,89.234 122.141,91.624 122.141,95.344 ULN2803.16@127.952,101.155
i6: 
i7: 7.2 ULN2803.15 | length 29.6
  Top Layer w0.8: 7.2@105.633,92.134 109.683,88.084 120.227,88.084 123.291,91.148 123.291,93.954 127.508,98.171 ULN2803.15
i8: 8. ULN2804.15 | length 45
  Bottom Layer w0.8: ULN2804.15@78.043,69.342 76.2,71.185 76.2,83.605 76.669,84.074 94.556,84.074 8.
i9: 9.2 ULN2803.14 | length 35.4
  Top Layer w0.8: 9.2@99.152,91.915 102.36,88.707 107.434,88.707 109.207,86.934 120.703,86.934 124.441,90.671 124.441,92.31 ULN2803.14@127.861,95.73
i10: 10. ULN2805.14 | length 78.1
  Top Layer w0.8: 10.@95.631,92.134 99.89,96.393 117.757,96.393 123.55,102.186 123.55,104.054 127.037,107.541 129.325,107.541 129.794,107.072 129.794,73.66 ULN2805.14
i11: 
i12: 12.2 ULN2803.13 | length 41.2
  Top Layer w0.8: 12.2 92.71,92.075 97.228,87.557 106.958,87.557 108.731,85.784 121.18,85.784 125.591,90.195 125.591,90.92 ULN2803.13
i13: 
i14: 14.2 ULN2803.12 | length 44
  Top Layer w0.8: 14.2@89.151,92.134 94.878,86.407 106.481,86.407 108.254,84.634 121.656,84.634 ; 121.91,84.634 127.762,90.486 ULN2803.12
i15: 15.2 ULN2804.12 | length 22.2
  Top Layer w0.8: ULN2804.12 79.728,78.966 79.728,82.141 82.089,84.502 85.946,84.502 87.877,86.433 87.877,88.907 85.955,90.829 85.955,91.904 15.2
i16: 16.2 ULN2804.11 | length 24.6
  Top Layer w0.8: ULN2804.11@77.748,79.732 76.732,79.732 76.228,80.236 76.228,84.102 77.851,85.725 85.543,85.725 86.727,86.909 86.727,88.328 86.723,88.332 86.723,88.355 84.948,90.13 83.439,91.639 83.243,91.639 82.748,92.134 16.2
i17: 17.1 ULN2805.11 | length 56.3
  Top Layer w0.8: 17.1@83.439,81.534 91.44,73.533 113.451,73.533 113.486,73.498 122.961,73.498 123.43,73.029 123.43,68.34 ULN2805.11 127.762,64.073 126.437,65.398
i18: 18.1 ULN2803.11 | length 44.6
  Top Layer w0.8: 18.1 87.063,81.602 90.678,85.217 106.045,85.217 107.783,83.479 122.976,83.479 ; 123.23,83.479 ULN2803.11
i19: 19.1 ULN2805.12 | length 45.9
  Top Layer w0.8: 19.1@90.297,81.602 97.216,74.683 113.927,74.683 113.962,74.648 123.438,74.648 124.58,73.506 124.58,69.73 ULN2805.12
i20: 
i21: 21.1 ULN2804.13 | length 18.6
  Bottom Layer w0.8: ULN2804.13@77.978,74.422 81.28,77.724 89.721,77.724 21.1
i22: 22.1 ULN2805.13 | length 37.7
  Top Layer w0.8: 22.1 96.96,81.602 102.729,75.833 114.403,75.833 114.438,75.798 123.914,75.798 125.73,73.982 125.73,71.12 ULN2805.13
i23: 23.1 ULN2804.14 | length 26.3
  Bottom Layer w0.8: ULN2804.14@77.978,71.882 78.295,72.2 82.169,76.073 94.674,76.073 23.1@100.203,81.602
i24: 
i25: 
i26: 
i27: 27.1 ULN2805.15 | length 26.1
  Top Layer w0.8: 27.1@105.029,81.729 105.145,81.845 105.421,81.845 110.283,76.983 114.88,76.983 114.915,76.948 124.982,76.948 ULN2805.15 ULN2805.15@127.762,74.041
i28: 28.1 ULN2804.16 | length 38.1
  Bottom Layer w0.8: ULN2804.16@77.978,66.802 79.728,68.552 79.728,71.268 83.136,74.676 99.187,74.676 103.618,79.107 105.709,79.107 28.1
i29: 29.1 ULN2805.16 | length 18.1
  Top Layer w0.8: 29.1 115.391,78.098 126.047,78.098 127.437,76.708 ULN2805.16
i30: 30.1 ULN2804.17 | length 46.4
  Bottom Layer w0.8: ULN2804.17@77.978,64.262 80.899,67.183 80.899,70.733 83.318,73.152 99.949,73.152 104.14,77.343 110.676,77.343 30.1
i31: 31.1 ULN2805.17 | length 10.4
  Top Layer w0.8: 31.1 120.845,79.248 ULN2805.17
i32: 32.1 ULN2805.18 | length 6.3
  Top Layer w0.8: 32.1 121.837,81.558 ULN2805.18@127.889,81.558
Input: Designator1.2 Regulator.adj
LED_R: LED.1@102.235,63.5 LED.2@107.95,64.008 | length 4.9
  Top Layer w0.8: LED.1@102.235,63.5 LED.2@107.116,63.5
N2b: 2_1.b 2_1_2_1.2 | length 6.5
  Top Layer w0.8: 2_1.b 59.922,108.839 61.087,108.839 62.388,107.538 2_1_2_1.2
N2c: 2_1.c 2_4_2_1.1 | length 14.8
  Top Layer w0.8: 2_1.c 60.521,106.563 61.295,105.788 63.41,105.788 64.435,106.813 64.435,114.17 2_4_2_1.1
  Bottom Layer w0.8: 2_1.c 2_1.c@60.401,106.563
N2e: 
N4b: 4_1.b 4_1_2_1.@62.729,100.457 | length 6
  Top Layer w0.8: 4_1.b 59.922,100.457 4_1_2_1.@62.729,100.457
N4c: 4_1.c 4_4_2_1.1 | length 23.9
  Top Layer w0.8: 4_1.c 60.289,98.274 61.614,98.274 62.019,98.679 63.881,98.679 67.286,102.084 67.286,113.619 4_4_2_1.1
  Bottom Layer w0.8: 4_1.c 4_1.c@60.426,98.411 ; 4_4_2_1.1@69.438,115.446 4_4_2_1.1
N4e: 
N6b: 6_1_2_1.2 6_3.b | length 6.5
  Top Layer w0.8: 6_3.b 60.087,92.24 60.921,92.24 61.766,93.085 62.455,93.085 6_1_2_1.2
N6c: 6_3.c 6_4_2_1.1 | length 37
  Top Layer w0.8: 6_3.c 60.332,89.799 61.945,91.412 66.901,91.412 70.231,94.742 70.231,111.983 72.019,113.771 74.042,113.771 6_4_2_1.1
  Bottom Layer w0.8: 6_4_2_1.1@75.841,115.57 76.073,115.57 6_4_2_1.1@76.042,115.601
N6e: 
N8b: 8_1.b 8_1_2_1.@73.601,85.852 | length 11
  Top Layer w0.8: 8_1_2_1.@73.601,85.852 73.629,85.88 75.466,85.88 78.966,89.38 80.598,89.38 82.348,87.63 8_1.b
N8c: 8_1.c 8_4_2_1.1 | length 32.3
  Top Layer w0.8: 8_4_2_1.1 82.646,115.446 79.474,112.274 79.474,92.103 81.193,90.384 82.144,90.384 84.898,87.63 8_1.c
N8e: 
N10b: 10_1.b 10_1_2_1.2 | length 7.1
  Top Layer w0.8: 10_1.b 57.531,85.598 59.982,88.049 60.004,88.049 60.921,88.049 62.534,89.662 10_1_2_1.2
N10c: 10_1.c 10_4_2_1.1 | length 42.5
  Top Layer w0.8: 10_1.c 60.081,85.481 61.301,86.701 61.301,86.704 62.509,87.912 65.783,87.912 71.47,93.599 71.47,111.596 72.495,112.621 76.194,112.621 10_4_2_1.1
N10e: 
N12b: 12_1.b 12_1_2_1.2 | length 6.2
  Top Layer w0.8: 12_1.b 59.927,96.27 61.76,96.27 62.36,96.87 12_1_2_1.2
N12c: 12_1.c 12_4_2_1.1 | length 28.9
  Top Layer w0.8: 12_1.c 61.271,95.064 63.568,95.064 68.436,99.932 68.436,111.815 71.542,114.921 71.566,114.921 72.186,115.541 72.589,115.541 72.74,115.39 12_4_2_1.1
N12e: 
N14b: 14_1.b 14_1_2_1.2 | length 6.2
  Top Layer w0.8: 14_1.b 59.795,104.521 61.822,104.521 62.36,103.982 14_1_2_1.2
N14c: 14_1.c 14_4_2_1.1 | length 18
  Top Layer w0.8: 14_1.c 60.442,102.372 60.582,102.232 63.456,102.232 66.136,104.913 14_4_2_1.1
N14e: 
N16b: 16_1.b 16_1_2_1.2 | length 6.6
  Top Layer w0.8: 16_1.b 59.396,112.504 61.037,112.504 16_1_2_1.2 ; 16_1_2_1.2@62.551,111.252 16_1_2_1.2@62.685,111.252
N16c: 16_1.c 16_4_2_1.1 | length 5.3
  Bottom Layer w0.8: 16_4_2_1.1 59.532,111.743 60.196,111.079 16_1.c
N16e: 
P2b: 2.P_b 2_4_2_1.2 3_4.1 | length 46.2
  Top Layer w0.8: 2_4_2_1.2 71.634,117.521 94.096,117.521 3_4.1 ; 2.P_b 95.647,113.677 95.647,115.595 3_4.1@95.792,115.74
P2c: 
P2e: 2.P_e 3_1.1 | length 4.2
  Top Layer w0.8: 2.P_e@90.666,112.268 2.P_e 92.314,114.027 3_1.1@92.314,115.74
P4b: 4.P_b 4_4_2_1.2 20_4.1 | length 52.7
  Top Layer w0.8: 4_4_2_1.2 75.938,119.821 105.004,119.821 20_4.1 109.085,113.399 4.P_b
P4c: 
P4e: 4.P_e 20_1.@105.815,115.74 | length 3.6
  Top Layer w0.8: 4.P_e@104.612,112.609 105.815,113.811 20_1.@105.815,115.74
P6b: 6.P_b 6_4_2_1.2 24_4.1 | length 59.2
  Top Layer w0.8: 6_4_2_1.2 80.242,122.121 116.039,122.121 24_4.1 120.45,113.77 120.45,110.92 6.P_b
P6c: 
P6e: 6.P_e 24_1.1 | length 3.7
  Top Layer w0.8: 6.P_e 118.225,112.555 119.118,113.448 24_1.1
P8b: 8.P_b 8_4_2_1.2 25_4.1 | length 62
  Top Layer w0.8: 8_4_2_1.2 82.646,125.996 84.182,124.46 126.908,124.46 25_4.1 135.398,115.51 135.398,114.695 133.223,112.52 8.P_b
P8c: 
P8e: 8.P_e 25_1.@132.326,115.74 | length 4.8
  Top Layer w0.8: 8.P_e 130.024,112.244 130.024,113.438 25_1.@132.326,115.74
P10b: 10.P_b 10_4_2_1.2 26_4.1 | length 58.9
  Top Layer w0.8: 10_4_2_1.2 82.394,123.271 121.493,123.271 26_4.1 129.024,115.585 125.845,112.407 10.P_b
P10c: 
P10e: 10.P_e 26_1.1 | length 5.1
  Top Layer w0.8: 10.P_e 122.416,112.216 125.722,115.522 26_1.1
P12b: 11_4.1 12.P_b 12_4_2_1.2 | length 56
  Top Layer w0.8: 12_4_2_1.2 78.09,120.971 110.585,120.971 11_4.1 115.634,115.558 115.634,113.026 12.P_b
P12c: 
P12e: 11_1.1 12.P_e | length 4
  Top Layer w0.8: 12.P_e 111.304,112.574 112.649,113.919 112.649,115.605 11_1.1
P14b: 13_4.1 14.P_b 14_4_2_1.2 | length 49.5
  Top Layer w0.8: 14_4_2_1.2 73.786,118.671 99.55,118.671 13_4.1 102.368,115.627 102.368,113.54 14.P_b
P14c: 
P14e: 13_1.1 14.P_e | length 4.2
  Top Layer w0.8: 14.P_e 97.524,112.703 98.918,114.097 13_1.1@98.918,115.74 ; 13_1.1 13_1.1@99.355,115.564
P16b: 6_4.1 16.P_b 16_4_2_1.2 | length 43
  Top Layer w0.8: 16.P_b 89.012,113.9 6_4.1@89.012,115.74
  Bottom Layer w0.8: 16_4_2_1.2 64.314,121.539 83.474,121.539 6_4.1
P16c: 
P16e: 6_1.1 16.P_e | length 4.2
  Top Layer w0.8: 16.P_e 84.201,112.772 84.479,113.049 85.71,114.281 6_1.1@85.71,115.615 ; 6_1.1 6_1.1@86.096,115.615
VCC: 3_1.2 3_4.2 4.7uF.1 6_1.2 6_4.2 11_1.2 11_4.2 13_1.2 13_4.2 20_1.@105.815,126.29 20_4.2 24_1.2 24_4.2 25_1.@132.326,126.29 25_4.2 26_1.2 26_4.2 47uF.1 LED.1@118.5,64.008 Regulator.in | length 239.5
  Top Layer w0.8: 6_1.2 6_4.2 3_1.2 3_4.2 13_1.2 13_4.2 105.815,126.29 20_4.2 11_1.2 11_4.2 24_1.2 24_4.2 26_1.2 26_4.2 132.326,126.29 25_4.2
  Bottom Layer w0.8: Regulator.in@65.151,63.871 65.151,60.706 65.977,59.88 76.2,59.88 ; 84.235,59.597 87.625,62.987 88.046,62.987 88.436,63.377 88.436,63.798 89.114,64.476 94.488,64.476 96.151,66.139 103.969,66.139 105.597,64.511 105.597,63.886 107.225,62.258 114.396,62.258 116.146,64.008 116.459,64.008 116.459,62.103 120.271,62.103 120.504,61.87 cw(c119.939,61.303) 120.507,61.867 120.617,61.742 ccw(c123.063,63.881) 125.129,61.372 125.595,60.906 126.783,59.718 ; 6_1.2 6_4.2 3_1.2 3_4.2 13_1.2 13_4.2 105.815,126.29 20_4.2 11_1.2 11_4.2 24_1.2 24_4.2 26_1.2 26_4.2 132.326,126.29 25_4.2 135.628,120.658 137.378,118.908 137.378,112.232 132.461,107.315 130.898,107.315 130.429,106.846 130.429,60.187 129.96,59.718 127.037,59.718
pads on no net: ULN2803.10 ULN2804.10 ULN2805.10
copper on no net: | length 137.1
  Top Layer w0.8: 52.451,131.445 52.451,131.953 ; 54.451,131.032 52.451,131.699 ; 54.451,132.366 52.451,131.699 ; 86.525,131.699 52.451,131.699 ; 108.293,131.699 142.367,131.699 ; 140.367,131.032 142.367,131.699 ; 140.367,132.366 142.367,131.699 ; 142.367,131.445 142.367,131.953 ; 147.923,58.261 148.59,56.261 ; 147.923,126.133 148.59,128.133 ; 148.336,56.261 148.844,56.261 ; 148.336,128.133 148.844,128.133 ; 148.59,81.313 148.59,56.261 ; 148.59,103.081 148.59,128.133 ; 149.257,58.261 148.59,56.261 ; 149.257,126.133 148.59,128.133

## Polygon pours and split planes (outlines as drawn)
VCC on Bottom Layer "VCC_L02_P005" (solid, pour order 5): 85.183,126.836 85.945,127.598 136.491,127.598 142.46,121.629 142.46,110.453 139.285,107.278 134.332,107.278 133.986,61.275 129.032,57.842 129.032,107.278 129.252,108.421 131.157,108.421 132.297,108.421 137.033,113.157 137.033,117.404 136.11,118.327 89.882,118.327 85.056,123.153
GND on Bottom Layer "GND_L02_P003" (solid, pour order 3): 52.646,121.285 56.261,121.285 56.261,89.662 56.261,84.328 71.501,84.328 71.501,82.169 58.674,82.169 58.674,77.216 61.849,77.216 61.849,70.231 64.258,67.822 65.49,66.929 65.49,64.77 63.119,64.77 63.119,59.817 64.135,58.801 85.725,58.801 85.725,57.531 52.981,57.531
GND on Bottom Layer "GND_L02_P014" (solid, pour order 14): 80.391,86.995 80.899,87.122 72.39,87.122 71.501,86.233 71.501,83.947 71.501,82.169 69.088,82.169 69.596,82.677 69.596,87.503 70.358,88.265 80.645,88.138 80,87.757
Input on Bottom Layer "INPUT_L02_P012" (solid, pour order 12): 58.928,81.788 58.928,77.47 61.595,77.47 61.849,77.216 61.849,70.231 61.976,70.231 65.151,67.056 66.294,67.056 66.421,66.929 66.421,82.042 66.548,82.169 58.674,82.169 58.674,78.867 59.055,78.486
VCC on Bottom Layer "VCC_L02_P011" (solid, remove dead copper, pour order 11): 63.246,64.516 63.373,64.643 66.421,64.643 66.421,61.087 66.929,60.579 69.215,60.579 69.215,59.182 69.088,59.055 64.389,59.055 64.135,58.801 63.119,59.817 63.119,64.77
VCC on Bottom Layer "VCC_L02_P000" (solid, pour order 0): 102.235,62.738 84.963,62.738 84.963,67.183 102.87,67.183 106.68,67.183 106.68,62.484 108.585,62.484 111.379,65.278 125.095,65.278 125.857,64.516 125.857,60.579 126.365,60.071 128.016,60.071 128.651,60.706 130.175,60.706 130.175,59.277 129.489,58.42 106.553,58.42
GND on Bottom Layer "GND_L02_P004" (solid, pour order 4): 56.936,58.4 136.271,58.039 136.271,56.81 58.61,56.727
GND on Bottom Layer "GND_L02_P002" (solid, pour order 2): 83.288,56.872 88.392,61.976 102.616,61.976 106.553,58.039 129.687,58.039 131.953,60.305 131.953,85.955 134.112,85.955 134.112,56.872
VCC on Bottom Layer "VCC_L02_P001" (solid, pour order 1): 79.375,59.182 79.375,64.262 82.296,67.183 88.392,67.047 88.392,62.484 85.09,59.182
GND on Top Layer "GND_L01_P007" (solid, pour order 7): 52.641,121.285 56.261,121.285 56.261,84.328 71.456,84.328 71.456,82.169 58.674,82.169 58.674,78.359 61.849,78.359 61.849,69.977 64.135,67.31 66.132,67.091 66.094,65.024 64.064,65.024 63.373,64.333 63.373,60.305 65.258,58.42 68.128,58.42 66.35,56.642 52.981,56.642
VCC on Top Layer "VCC_L01_P013" (solid, pour order 13): 63.627,64.262 64.262,64.897 66.421,64.897 66.421,61.087 66.802,60.706 70.739,60.706 70.485,60.452 70.485,58.801 70.255,58.571 65.254,58.571 63.246,60.579 63.373,60.706 63.373,64.516 63.881,65.024 65.079,65.024
GND on Top Layer "GND_L01_P010" (solid, pour order 10): 83.058,56.642 88.392,61.976 102.737,61.976 106.332,58.039 128.778,58.039 131.064,60.325 131.064,86.614 133.985,86.614 133.985,56.642
VCC on Top Layer "VCC_L01_P008" (solid, pour order 8): 107.95,64.008 85.598,62.865 83.947,67.056 102.743,67.056 106.68,67.056 113.665,67.056 119.507,67.056 119.507,62.865 108.934,62.865
VCC on Top Layer "VCC_L01_P009" (solid, pour order 9): 79.776,60.071 79.375,60.472 79.375,63.607 82.316,66.548 83.967,66.548 87.757,62.757 87.757,61.849 84.836,58.928 80.156,58.928
GND on Top Layer "GND_L01_P006" (solid, pour order 6): 59.182,58.674 136.271,58.674 136.271,56.843 61.013,56.843

## Keep-outs
Keep-Out Layer:
  lines w0.6: 52.451,56.261 52.451,128.016 142.367,128.016 142.367,56.261 52.451,56.261

## Other copper
Top Layer:
  rectangle net GND: 133.985,83.185 136.525,86.614
  rectangle net GND: 133.858,57.023 136.271,62.357
  region net VCC: 65.863,58.943 66.294,59.69 65.283,60.274 64.852,59.527
  rectangle net VCC: 85.09,125.222 136.271,127.254
  rectangle net VCC: 65.659,58.928 80.899,60.579
  text "89.916 (mm)" at 86.779,129.899 h2
  text "71.872 (mm)" at 150.39,81.567 h2 r90
Bottom Layer:
  rectangle net GND: 64.77,57.023 86.614,58.674
  rectangle net VCC: 68.58,59.182 80.137,60.579
  rectangle net GND: 133.223,57.023 136.271,62.484
  rectangle net GND: 132.08,83.185 136.398,85.955
  text "AYESHA" at 118.626,87.749 h2.5
  text "Exp 9" at 118.626,84.518 h2.5
  text "B2" at 103.894,84.066 h2.5
Multi-Layer:
  circle w2.5: c139.192,59.563 r1.25
  circle w2.5: c139.192,124.714 r1.25
  circle w2.5: c55.626,124.714 r1.25
  circle w2.5: c55.626,59.563 r1.25

## Text inside footprints (layer, text, board x,y; h text height)
2: Bottom Overlay "c" at 88.634,109.458 h1.5 r88.09; Bottom Overlay "e" at 89.396,113.141 h1.5 r90; Bottom Overlay "b" at 90.666,108.315 h1.52 r90
4: Bottom Overlay "c" at 102.35,109.458 h1.5 r88.09; Bottom Overlay "e" at 103.112,113.141 h1.5 r90; Bottom Overlay "b" at 104.382,108.315 h1.52 r90
4.7uF: Bottom Overlay "+" at 96.266,65.405 h1.5 r90
6: Bottom Overlay "c" at 116.193,109.458 h1.5 r88.09; Bottom Overlay "e" at 116.955,113.141 h1.5 r90; Bottom Overlay "b" at 118.225,108.315 h1.52 r90
8: Bottom Overlay "b" at 133.858,112.014 h1.52 r180; Bottom Overlay "e" at 129.477,110.363 h1.5 r180; Bottom Overlay "c" at 132.715,109.982 h1.5 r178.09
10: Bottom Overlay "c" at 125.337,109.966 h1.5 r178.09; Bottom Overlay "e" at 121.654,110.728 h1.5 r180; Bottom Overlay "b" at 126.48,111.998 h1.52 r180
12: Bottom Overlay "c" at 109.272,109.458 h1.5 r88.09; Bottom Overlay "e" at 110.034,113.141 h1.5 r90; Bottom Overlay "b" at 111.304,108.315 h1.52 r90
14: Bottom Overlay "c" at 95.492,109.458 h1.5 r88.09; Bottom Overlay "e" at 96.254,113.141 h1.5 r90; Bottom Overlay "b" at 97.016,108.315 h1.52 r90
16: Bottom Overlay "c" at 81.776,109.458 h1.5 r88.09; Bottom Overlay "e" at 82.538,113.141 h1.5 r90; Bottom Overlay "b" at 83.808,108.315 h1.52 r90
47uF: Bottom Overlay "+" at 89.408,65.532 h1.5 r90
Designator1: Top Overlay "Block Connector" at 63.26,74.93 h0.51 r90
Regulator: Bottom Overlay "LM" at 61.751,68.927 h1.52; Bottom Overlay "317" at 62.451,61.877 h1.52